# Altium PCB STM32F429.PcbDoc (part 2 of 2)
Units mm, origin at the board's own origin, x right, y up, seen from the top; angles counter-clockwise.
Board outline 66.8 x 95.4 mm, 2 copper layers (Top Layer, Bottom Layer); 134 components, 138 nets, 653 pads, 375 vias.
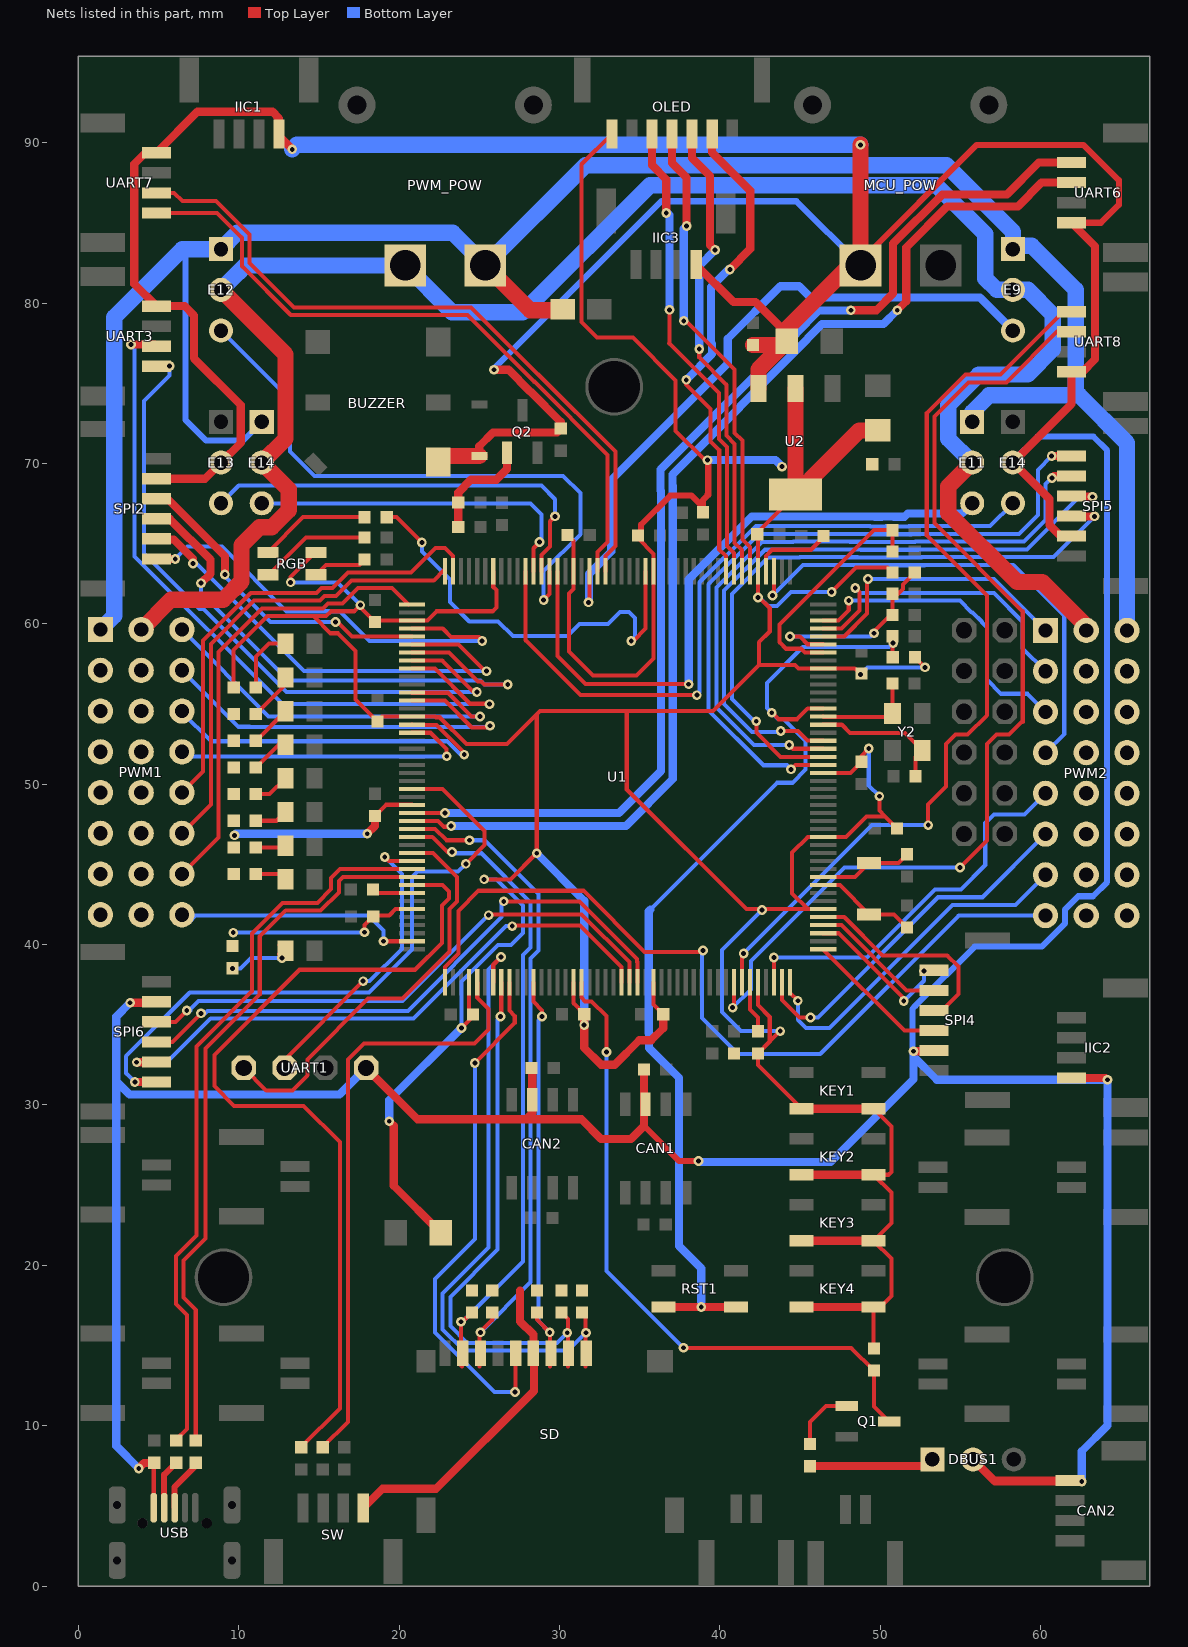
[diagram p2: the nets of this part, all layers, seen from the top]

## Via types
v1: diameter 0.61, hole 0.305, Top Layer to Bottom Layer, tented both sides, 375 vias

## Nets (pads, with @x,y where several pads share a name; then routed paths per layer and width w, separated by ;. In a path a pad name is that pad's centre, name@x,y a point inside that pad or via, vN(x,y) a via of type N, cw(c..) or ccw(c..) an arc to the next point about the centre after c; other vN are vias at no path point) (continued)
NetC8_1: C8.1 U1.125 | length 2.7
  Top Layer w0.254: C8.1@18.364,43.434 18.364,43.226 20.782,43.226 U1.125@20.799,43.208
NetC12_2: C12.2 U1.9 Y1.2 | length 6.3
  Top Layer w0.254: U1.9@46.43,43.708 47.478,43.708 Y1.2@49.301,41.885 50.84,41.885 C12.2@51.665,41.059
NetC13_2: C13.2 U1.10 Y1.1 | length 5.8
  Top Layer w0.254: U1.10@46.43,44.208 48.425,44.208 Y1.1@49.301,45.085 51.119,45.085 C13.2@51.665,45.631
NetC14_2: C14.2 U1.29 Y2.3 | length 8.6
  Top Layer w0.254: U1.29@46.43,53.708 47.593,53.708 48.114,53.188 51.534,53.188 Y2.3@52.616,52.105 52.197,51.686 C14.2@52.197,50.492
NetC15_2: C15.2 U1.30 Y2.1 | length 6.4
  Top Layer w0.254: U1.30@46.43,54.208 46.448,54.191 50.766,54.191 Y2.1@50.766,54.405 50.749,54.422 C15.2@50.749,56.286
NetDBUS1_1: DBUS1.1 R3.2 | length 7.8
  Top Layer w0.508: R3.2@45.617,7.48 52.819,7.48 DBUS1.1@53.238,7.899
NetLED1_1: D1.1 R9.2 | length 4.1
  Top Layer w0.254: R9.2@11.062,56.031 11.062,57.95 11.887,58.776 12.878,58.776 D1.1@12.903,58.75
NetLED2_1: D2.1 R10.2 | length 3
  Top Layer w0.254: R10.2@11.062,54.369 12.903,56.21 D2.1@12.903,56.653
NetLED3_1: D3.1 R11.2 | length 2.6
  Top Layer w0.254: R11.2@11.062,52.707 12.903,54.548 D3.1@12.903,54.556
NetLED4_1: D4.1 R13.2 | length 2.4
  Top Layer w0.254: R13.2@11.062,51.045 12.475,52.458 D4.1@12.903,52.458
NetLED5_1: D5.1 R14.2 | length 2.2
  Top Layer w0.254: R14.2@11.062,49.383 11.925,49.383 D5.1@12.903,50.361
NetLED6_1: D6.1 R15.2 | length 2.1
  Top Layer w0.254: R15.2@11.062,47.721 12.361,47.721 D6.1@12.903,48.264
NetLED7_1: D7.1 R17.2 | length 1.9
  Top Layer w0.254: R17.2@11.062,46.059 12.796,46.059 D7.1@12.903,46.166
NetLED8_1: D8.1 R18.2 | length 2
  Top Layer w0.254: R18.2@11.062,44.398 12.575,44.398 D8.1@12.903,44.069
NetPWR_1: PWR.1 R29.2 | length 4.5
  Top Layer w0.254: PWR.1@12.548,39.98 12.802,39.726 12.497,39.421 12.7,39.218 v1(12.7,39.167)
  Bottom Layer w0.254: v1(9.6,38.519) 10.108,38.519 10.755,39.167 v1(12.7,39.167)
NetQ1_1: Q1.1 R3.1 | length 4.1
  Top Layer w0.254: R3.1@45.618,8.865 45.618,10.236 46.609,11.227 Q1.1@47.904,11.227
NetQ2_1: Q2.1 R4.2 R5.2 | length 6.8
  Top Layer w0.508: R4.2@23.685,66.042 R5.2@23.685,67.566 23.685,68.186 24.486,68.986 26.06,68.986 26.721,69.647 Q2.1@26.721,70.663
NetR6_1: R6.1 U1.48 | length 5.1
  Top Layer w0.254: U1.48@42.865,63.274 42.865,64.229 43.254,64.618 45.669,64.618 46.355,65.303 R6.1@46.355,65.481
NetR12_1: R12.1 U1.171 | length 3.3
  Top Layer w0.254: U1.171@41.865,37.643 41.865,35.961 42.367,35.458 R12.1@42.367,34.595
NetR22_2: R22.2 RGB.R | length 6.9
  Top Layer w0.254: RGB.R@11.809,64.454 14.007,66.651 R22.2@17.844,66.651
NetR23_2: R23.2 RGB.B | length 3.4
  Top Layer w0.254: RGB.B@14.81,63.054 15.434,63.678 17.512,63.678 R23.2@17.843,64.01
NetR24_2: R24.2 RGB.G | length 7
  Top Layer w0.254: RGB.G@11.809,63.054 11.862,63.054 14.19,65.381 R24.2@17.843,65.381
NetR27_1: R27.1 USB.2 | length 3.1
  Top Layer w0.381: USB.2@5.344,4.891 5.344,6.945 R27.1@6.096,7.696
NetR28_1: R28.1 USB.3 | length 3.4
  Top Layer w0.381: USB.3@5.994,4.891 5.994,6.186 7.315,7.506 R28.1@7.315,7.696
OLED_CLK(PA5): OLED.3 U1.51 | length 29.4
  Top Layer w0.254: v1(38.71,77.14) 38.71,76.606 40.411,74.905 40.411,71.733 40.919,71.225 40.919,65.047 41.365,64.601 U1.51@41.365,63.274
  Top Layer w0.508: OLED.3@38.263,90.549 38.263,89.042 39.385,87.92 39.385,83.602 39.675,83.312 v1(39.7,83.312)
  Bottom Layer w0.508: v1(38.71,77.14) 38.71,82.321 v1(39.7,83.312)
OLED_DC(PA4): OLED.4 U1.50 | length 29.5
  Top Layer w0.254: v1(37.744,78.892) 37.891,78.892 40.919,75.864 40.919,71.907 41.402,71.425 41.402,65.247 41.865,64.784 U1.50@41.865,63.274
  Top Layer w0.508: OLED.4@37.013,90.549 37.013,88.742 37.922,87.833 v1(37.922,84.811)
  Bottom Layer w0.508: v1(37.744,78.892) 37.744,84.633 v1(37.922,84.811)
OLED_MOSI(PA7): OLED.2 U1.53 | length 31
  Top Layer w0.254: v1(37.897,75.213) 37.897,74.93 39.421,73.406 39.421,71.359 39.954,70.825 39.954,64.639 40.365,64.229 U1.53@40.365,63.274
  Top Layer w0.508: OLED.2@39.513,90.549 39.513,89.384 41.885,87.013 41.885,83.363 v1(40.615,82.093)
  Bottom Layer w0.508: v1(37.897,75.213) 39.497,76.814 39.497,77.466 39.446,77.517 39.446,81.001 40.538,82.093 v1(40.615,82.093)
OLED_RST(PA6): OLED.5 U1.52 | length 29.5
  Top Layer w0.254: v1(36.855,79.578) 36.855,77.521 36.83,77.495 39.929,74.397 39.929,71.533 40.437,71.025 40.437,64.847 40.865,64.419 U1.52@40.865,63.274
  Top Layer w0.508: OLED.5@35.763,90.549 35.763,88.595 36.652,87.706 v1(36.652,85.623)
  Bottom Layer w0.508: v1(36.652,85.623) 36.728,85.623 36.855,85.496 v1(36.855,79.578)
PE13: E13.3 U1.76 | length 26.5
  Top Layer w0.254: U1.76@28.865,63.274 28.865,64.278 29.413,64.827 29.413,66.396 v1(29.718,66.7)
  Bottom Layer w0.254: E13.3@8.89,67.513 9.996,68.619 28.866,68.619 29.718,67.767 v1(29.718,66.7)
PE14: E14.3@58.268,67.513 U1.78 | length 45.1
  Top Layer w0.254: U1.78@27.865,63.274 27.865,58.978 31.293,55.55 v1(38.557,55.55)
  Bottom Layer w0.254: v1(38.557,55.55) 38.735,55.728 38.735,62.592 42.234,66.091 49.371,66.091 49.397,66.065 50.337,66.065 50.363,66.091 50.577,66.091 50.602,66.065 51.76,66.065 51.785,66.091 56.845,66.091 E14.3@58.268,67.513
PGND: E9.1 E11.1 E12.1 E14.1@11.43,72.593 PWM1.1 PWM1.4 PWM1.7 PWM1.10 PWM1.13 PWM1.16 PWM1.19 PWM1.22 PWM2.3 PWM2.6 PWM2.9 PWM2.12 PWM2.15 PWM2.18 PWM2.21 PWM2.24 PWM_POW.2 R39.1 | length 142.3
  Top Layer w1.016: PWM_POW.2@25.371,82.347 28.165,79.553 R39.1@30.429,79.553
  Bottom Layer w0.381: 6.833,83.363 6.667,83.197 6.667,72.724 7.966,71.424 10.261,71.424 E14.1@11.43,72.593
  Bottom Layer w1.016: PWM1.1@1.372,59.639 2.235,60.503 2.235,79.121 6.477,83.363 6.833,83.363 E12.1@8.89,83.363 9.911,84.383 23.334,84.383 PWM_POW.2@25.371,82.347 31.619,88.595 54.127,88.595 58.268,84.455 E9.1@58.268,83.363 58.471,83.566 59.436,83.566 62.179,80.823 62.179,74.244 ; E11.1@55.728,72.593 55.728,73.191 56.781,74.244 62.408,74.244 65.38,71.272 PWM2.3@65.38,59.588
PWM_5V: E9.2 E11.2 E12.2 E14.2@11.43,70.053 PWM1.2 PWM1.5 PWM1.8 PWM1.11 PWM1.14 PWM1.17 PWM1.20 PWM1.23 PWM2.2 PWM2.5 PWM2.8 PWM2.11 PWM2.14 PWM2.17 PWM2.20 PWM2.23 PWM_POW.1 | length 122.2
  Top Layer w1.016: PWM1.2@3.912,59.639 5.766,61.493 9.027,61.493 10.17,62.637 10.17,64.907 11.29,66.027 12.046,66.027 13.106,67.087 13.106,68.377 E14.2@11.43,70.053 11.432,70.053 12.917,71.538 12.917,76.796 E12.2@8.89,80.823 ; E11.2@55.728,70.053 54.241,68.567 54.241,66.897 58.527,62.611 60.096,62.611 62.84,59.868 PWM2.2@62.84,59.588
  Bottom Layer w1.016: E12.2@8.89,80.823 9.943,81.876 9.945,81.876 10.377,82.308 10.377,82.309 10.414,82.347 PWM_POW.1@20.371,82.347 23.292,79.426 27.711,79.426 35.636,87.351 53.492,87.351 56.541,84.302 56.541,81.533 57.252,80.823 E9.2@58.268,80.823 59.207,80.823 60.757,79.273 60.757,77.114 59.182,75.54 56.132,75.54 54.241,73.648 54.241,71.538 55.726,70.053 E11.2@55.728,70.053
R(PF13): R22.1 U1.63 | length 26.9
  Top Layer w0.254: R22.1@19.228,66.65 19.837,66.65 v1(21.412,65.075) ; v1(34.468,58.928) 34.595,58.928 35.365,59.698 U1.63@35.365,63.274
  Bottom Layer w0.254: v1(21.412,65.075) 21.412,64.513 23.165,62.76 23.165,61.35 24.368,60.147 26.172,60.147 27.086,59.233 30.492,59.233 31.254,59.995 33.026,59.995 33.762,60.731 34.315,60.731 34.696,60.35 34.696,59.03 34.595,58.928 v1(34.468,58.928)
RESET: C2.2 R1.1 RST1.1 U1.31 | length 64.4
  Top Layer w0.254: v1(43.231,54.458) 43.637,54.051 44.815,54.051 45.472,54.708 U1.31@46.43,54.708 ; C2.2@50.762,59.232 50.762,57.925 R1.1@50.775,57.912
  Top Layer w0.508: RST1.1@36.493,17.41 v1(38.837,17.41) RST1.1@40.993,17.41
  Bottom Layer w0.254: 35.662,42.184 43.567,50.089 44.52,50.089 45.339,50.907 45.339,52.699 43.974,54.064 43.624,54.064 v1(43.231,54.458) 42.926,54.762 42.926,56.312 45.161,58.547 50.546,58.547 v1(50.8,58.801)
  Bottom Layer w0.508: 35.662,42.184 35.56,42.082 35.56,34.472 35.585,34.446 35.585,33.553 37.44,31.699 37.44,21.209 38.837,19.812 v1(38.837,17.41)
SDIO_CLK(PC12): SD.5 U1.141 | length 33
  Top Layer w0.254: v1(24.714,32.614) 27.203,35.103 27.203,35.554 26.865,35.893 U1.141@26.865,37.643 ; v1(27.212,12.099) 27.263,12.15 SD.5@27.263,14.524
  Bottom Layer w0.254: v1(24.714,32.614) 24.714,21.641 22.225,19.152 22.225,15.811 25.937,12.099 v1(27.212,12.099)
SDIO_CMD(PD2): R34.2 SD.3 U1.144 | length 26.1
  Top Layer w0.254: U1.144@28.365,37.643 28.365,36.44 28.905,35.9 v1(28.905,35.509) ; R34.2@28.599,17.056 28.599,16.613 v1(29.388,15.824) 29.412,15.8 29.412,13.686
  Bottom Layer w0.254: v1(28.905,35.509) 28.677,35.281 28.677,16.535 v1(29.388,15.824)
SDIO_D0(PC8): R35.2 SD.7 U1.117 | length 42.1
  Top Layer w0.254: U1.117@20.799,47.208 22.244,47.208 22.945,46.507 v1(24.384,46.507) ; 25.012,13.686 25.012,15.818 25.805,16.61 R35.2@25.805,17.056
  Bottom Layer w0.254: v1(24.384,46.507) 25.32,46.507 28.677,43.151 28.677,39.624 28.194,39.141 28.194,18.948 v1(25.07,15.824)
SDIO_D1(PC9): R36.2 SD.8 U1.118 | length 40.8
  Top Layer w0.254: U1.118@20.799,46.708 22.062,46.708 22.999,45.771 v1(23.292,45.771) ; 23.912,13.686 23.851,13.748 v1(23.851,16.485) 23.963,16.485 R36.2@24.535,17.056
  Bottom Layer w0.254: v1(23.292,45.771) 23.368,45.695 25.137,45.695 28.194,42.637 28.194,39.824 27.711,39.341 27.711,20.233 23.963,16.485 v1(23.851,16.485)
SDIO_D2(PC10): R32.2 SD.1 U1.139 | length 39.9
  Top Layer w0.254: U1.139@25.865,37.643 25.865,38.743 v1(26.34,39.218) ; R32.2@31.393,17.056 31.612,16.836 31.612,13.686
  Bottom Layer w0.254: v1(26.34,39.218) 25.578,38.456 25.578,21.104 22.708,18.234 22.708,16.011 24.038,14.681 30.531,14.681 v1(31.648,15.799)
SDIO_D3(PC11): R33.2 SD.2 U1.140 | length 34.4
  Top Layer w0.254: v1(26.314,35.509) 26.416,35.509 26.284,35.641 26.365,35.722 U1.140@26.365,37.643 ; R33.2@30.123,17.056 30.512,16.666 30.512,13.686
  Bottom Layer w0.254: v1(26.314,35.509) 26.137,35.331 26.137,20.98 23.19,18.034 23.19,16.211 24.237,15.164 29.845,15.164 v1(30.48,15.799)
SPI2_CLK(PB13): SPI2.3 U1.93 | length 20.2
  Top Layer w0.254: v1(16.027,60.122) 16.151,60.122 17.065,59.208 U1.93@20.799,59.208
  Top Layer w0.508: SPI2.3@4.864,67.798 5.547,67.798 9.129,64.216 v1(9.129,63.068)
  Bottom Layer w0.254: v1(9.129,63.068) 9.129,62.956 11.963,60.122 v1(16.027,60.122)
SPI2_MISO(PB14): SPI2.5 U1.94 | length 29.6
  Top Layer w0.254: U1.94@20.799,58.708 23.689,58.708 25.349,57.048 v1(25.451,57.048)
  Top Layer w0.508: SPI2.5@4.864,65.298 SPI2.5@4.935,65.227 ; SPI2.5@4.91,65.253 5.943,65.253 7.137,64.059 v1(7.137,63.754)
  Bottom Layer w0.254: v1(7.137,63.754) 7.36,63.754 14.066,57.048 v1(25.451,57.048)
SPI2_MOSI(PB15): SPI2.4 U1.95 | length 35
  Top Layer w0.254: U1.95@20.799,58.208 23.117,58.208 24.912,56.413 25.115,56.413 25.318,56.21 v1(26.772,56.21)
  Top Layer w0.508: SPI2.4@4.864,66.548 5.69,66.548 8.23,64.008 8.23,63.119 v1(7.645,62.535)
  Bottom Layer w0.254: v1(7.645,62.535) 7.645,61.925 13.106,56.464 25.064,56.464 25.318,56.21 v1(26.772,56.21)
SPI2_NSS(PB12): SPI2.6 U1.92 | length 27.8
  Top Layer w0.254: U1.92@20.799,59.708 22.715,59.708 23.232,59.191 24.985,59.191 25.171,59.004 v1(25.171,58.928)
  Top Layer w0.508: SPI2.6@4.864,64.048 v1(6.034,64.048)
  Bottom Layer w0.254: v1(6.034,64.048) 6.807,64.821 8.941,64.821 12.979,60.782 16.301,60.782 18.155,58.928 v1(25.171,58.928)
SPI4_CLK(PE2): SPI4.3 U1.1 | length 9
  Top Layer w0.254: U1.1@46.43,39.708 51.493,34.646 SPI4.3@53.34,34.646
SPI4_MISO(PE5): SPI4.5 U1.4 | length 8.6
  Top Layer w0.254: U1.4@46.43,41.208 47.568,41.208 51.63,37.146 SPI4.5@53.34,37.146
SPI4_MOSI(PE6): SPI4.4 U1.5 | length 13.4
  Top Layer w0.254: U1.5@46.43,41.708 47.75,41.708 50.139,39.319 54.169,39.319 54.864,38.624 54.864,36.917 53.843,35.896 SPI4.4@53.34,35.896
SPI4_NSS(PE4): SPI4.6 U1.3 | length 9.9
  Top Layer w0.254: U1.3@46.43,40.708 47.385,40.708 51.46,36.633 v1(51.46,36.474) ; v1(52.73,38.354) 53.298,38.354 SPI4.6@53.34,38.396
  Bottom Layer w0.254: v1(51.46,36.474) 52.73,37.744 v1(52.73,38.354)
SPI5_CLK(PF7): SPI5.3 U1.25 | length 40.2
  Top Layer w0.254: v1(42.266,53.924) 42.266,53.213 43.77,51.708 U1.25@46.43,51.708
  Top Layer w0.508: SPI5.3@61.925,66.72 61.945,66.7 v1(63.348,66.7)
  Bottom Layer w0.254: v1(42.266,53.924) 42.141,53.924 40.742,55.324 40.742,61.869 43.008,64.135 44.961,64.135 44.987,64.16 47.695,64.16 47.704,64.151 48.581,64.151 48.597,64.135 52.559,64.135 52.585,64.16 60.808,64.16 v1(63.348,66.7)
SPI5_MISO(PF8): SPI5.5 U1.26 | length 41.6
  Top Layer w0.254: v1(44.323,52.451) 44.566,52.208 U1.26@46.43,52.208
  Top Layer w0.508: v1(60.706,69.088) 60.838,69.22 SPI5.5@61.925,69.22
  Bottom Layer w0.254: v1(44.323,52.451) 42.122,52.451 39.776,54.797 39.776,62.268 42.608,65.1 44.562,65.1 44.587,65.126 48.094,65.126 48.104,65.116 48.981,65.116 48.997,65.1 52.159,65.1 52.185,65.126 58.953,65.126 60.3,66.472 60.3,68.708 60.68,69.088 v1(60.706,69.088)
SPI5_MOSI(PF9): SPI5.4 U1.27 | length 41
  Top Layer w0.254: v1(43.79,53.315) 44.869,53.315 45.458,52.726 46.413,52.726 U1.27@46.43,52.708
  Top Layer w0.508: SPI5.4@61.925,67.97 61.976,67.92 v1(63.221,67.92)
  Bottom Layer w0.254: v1(43.79,53.315) 43.739,53.264 41.992,53.264 40.259,54.997 40.259,62.068 42.808,64.618 44.761,64.618 44.787,64.643 47.894,64.643 47.904,64.634 48.781,64.634 48.797,64.618 52.359,64.618 52.385,64.643 59.153,64.643 60.782,66.272 60.782,66.319 62.382,67.92 v1(63.221,67.92)
SPI5_NSS(PF6): SPI5.6 U1.24 | length 44.3
  Top Layer w0.254: v1(44.425,50.927) 44.706,51.208 U1.24@46.43,51.208
  Top Layer w0.508: v1(60.681,70.46) 61.936,70.46 SPI5.6@61.925,70.47
  Bottom Layer w0.254: v1(44.425,50.927) 44.171,51.181 42.71,51.181 39.294,54.597 39.294,62.468 42.434,65.608 49.172,65.608 49.197,65.583 51.96,65.583 51.985,65.608 58.649,65.608 59.817,66.777 59.817,69.596 v1(60.681,70.46)
SPI6_CLK(PG13): SPI6.3 U1.156 | length 34.8
  Top Layer w0.254: SPI6.3@4.864,35.184 6.051,35.184 v1(6.756,35.89) ; v1(25.578,41.834) 25.629,41.885 31.376,41.885 34.347,38.913 34.347,37.643 U1.156@34.365,37.643
  Bottom Layer w0.254: v1(6.756,35.89) 6.985,35.89 6.985,35.986 7.473,36.474 20.218,36.474 v1(25.578,41.834)
SPI6_MISO(PG12): SPI6.5 U1.155 | length 37
  Top Layer w0.254: v1(27.051,41.148) 27.102,41.199 31.264,41.199 33.865,38.598 U1.155@33.865,37.643
  Top Layer w0.508: v1(3.632,32.664) 4.844,32.664 SPI6.5@4.864,32.684
  Bottom Layer w0.254: v1(3.632,32.664) 5.531,32.664 8.249,35.382 20.888,35.382 26.654,41.148 v1(27.051,41.148)
SPI6_MOSI(PG14): SPI6.4 U1.157 | length 37.1
  Top Layer w0.254: SPI6.4@4.864,33.934 5.867,33.934 v1(7.645,35.712) ; v1(26.518,42.697) 31.245,42.697 34.83,39.113 34.83,38.913 ; U1.157@34.865,37.643 34.865,38.913
  Bottom Layer w0.254: v1(7.645,35.712) 7.897,35.712 8.049,35.865 20.543,35.865 26.391,41.713 26.391,42.57 v1(26.518,42.697)
SPI6_NSS(PG8): SPI6.6 U1.112 | length 40.1
  Top Layer w0.254: U1.112@20.799,49.708 22.707,49.708 25.324,47.092 25.324,46.203 v1(24.155,45.034)
  Top Layer w0.508: v1(3.516,31.434) SPI6.6@4.864,31.434
  Bottom Layer w0.254: v1(3.516,31.434) 2.972,31.979 2.972,33.04 6.94,37.008 18.123,37.008 20.799,39.684 20.799,44.218 21.136,44.555 23.676,44.555 v1(24.155,45.034)
SWCLK(PA14): R20.2 U1.137 | length 37.6
  Top Layer w0.254: R20.2@15.232,8.66 16.815,10.242 16.815,32.837 17.811,33.833 24.689,33.833 25.565,34.709 25.565,35.988 24.865,36.688 U1.137@24.865,37.643
SWDIO(PA13): R19.2 U1.124 | length 54.2
  Top Layer w0.254: R19.2@13.888,8.66 16.307,11.079 16.307,27.686 14.046,29.947 9.703,29.947 8.471,31.178 8.471,33.109 13.792,38.43 20.976,38.43 22.657,40.111 22.657,42.424 23.114,42.881 23.114,43.307 22.713,43.708 U1.124@20.799,43.708
TIM1_CH1(PE9): E9.3 U1.70 | length 42.3
  Top Layer w0.254: v1(31.801,61.341) 31.865,61.405 U1.70@31.865,63.274
  Bottom Layer w0.508: v1(31.801,61.341) 31.826,61.366 31.826,63.119 33.223,64.516 33.223,68.961 40.488,76.225 40.488,77.775 43.764,81.051 44.933,81.051 45.644,80.34 56.21,80.34 E9.3@58.268,78.283
TIM1_CH2(PE11): E11.3 U1.74 | length 40.4
  Top Layer w0.254: U1.74@29.865,63.274 29.865,57.994 31.623,56.236 v1(38.049,56.236)
  Bottom Layer w0.508: v1(38.049,56.236) 38.049,62.768 41.981,66.7 49.624,66.7 49.649,66.675 50.085,66.675 50.11,66.7 50.829,66.7 50.855,66.675 51.507,66.675 51.71,66.878 55.093,66.878 E11.3@55.728,67.513
TIM1_CH3(PE12): E12.3 U1.75 | length 38
  Top Layer w0.254: v1(29.007,61.493) 29.365,61.851 U1.75@29.365,63.274
  Bottom Layer w0.254: E12.3@8.89,78.283 13.183,73.99 13.183,70.739 14.707,69.215 30.226,69.215 31.293,68.148 31.293,65.583 29.007,63.297 v1(29.007,61.493)
TIM1_CH4(PE14): E14.3@11.43,67.513 U1.77 | length 21.8
  Top Layer w0.254: U1.77@28.365,63.274 28.365,64.712 v1(28.753,65.1)
  Bottom Layer w0.254: E14.3@11.43,67.513 28.189,67.513 28.88,66.822 28.88,64.973 v1(28.753,65.1)
TIM2_CH1(PA0): PWM2.1 U1.40 | length 17.9
  Top Layer w0.254: U1.40@46.43,59.208 47.75,59.208 49.174,60.633 49.174,62.738 v1(49.225,62.789)
  Bottom Layer w0.254: v1(49.225,62.789) 57.099,62.789 PWM2.1@60.3,59.588
TIM2_CH2(PA1): PWM2.4 U1.41 | length 19.2
  Top Layer w0.254: U1.41@46.43,59.708 47.568,59.708 48.692,60.832 48.692,61.976 v1(48.438,62.23)
  Bottom Layer w0.254: v1(48.438,62.23) 48.743,61.925 57.081,61.925 58.877,60.129 58.877,58.471 PWM2.4@60.3,57.048
TIM2_CH3(PA2): PWM2.7 U1.42 | length 19.5
  Top Layer w0.254: U1.42@46.43,60.208 47.385,60.208 48.031,60.855 v1(48.031,61.443)
  Bottom Layer w0.254: v1(48.031,61.443) 54.973,61.443 55.697,60.719 55.748,60.719 56.337,60.129 56.337,60.079 56.642,59.774 56.642,56.533 57.536,55.639 59.169,55.639 PWM2.7@60.3,54.508
TIM2_CH4(PA3): PWM2.10 U1.47 | length 30.9
  Top Layer w0.254: v1(43.282,61.773) 43.365,61.856 U1.47@43.365,63.274
  Bottom Layer w0.254: v1(43.282,61.773) 45.187,63.678 47.495,63.678 47.504,63.669 48.381,63.669 48.397,63.652 52.759,63.652 52.785,63.678 58.288,63.678 61.468,60.498 61.468,53.137 PWM2.10@60.3,51.968
TIM4_CH1(PD12): PWM1.3 U1.100 | length 25.7
  Top Layer w0.254: U1.100@20.799,55.708 20.805,55.702 23.047,55.702 24.52,54.229 v1(25.044,54.229)
  Bottom Layer w0.254: PWM1.3@6.452,59.639 11.862,54.229 v1(25.044,54.229)
TIM4_CH2(PD13): PWM1.6 U1.101 | length 26.3
  Top Layer w0.254: U1.101@20.799,55.208 22.858,55.208 24.523,53.543 25.629,53.543 25.654,53.569 v1(25.654,53.645)
  Bottom Layer w0.254: PWM1.6@6.452,57.099 9.969,53.581 10.681,53.581 10.693,53.569 25.578,53.569 v1(25.654,53.645)
TIM4_CH3(PD14): PWM1.9 U1.104 | length 22.9
  Top Layer w0.254: U1.104@20.799,53.708 20.817,53.691 22.328,53.691 24.054,51.965 v1(24.054,51.841)
  Bottom Layer w0.254: PWM1.9@6.452,54.559 6.452,54.483 8.255,52.68 22.987,52.68 23.825,51.841 v1(24.054,51.841)
TIM4_CH4(PD15): PWM1.12 U1.105 | length 19.7
  Top Layer w0.254: U1.105@20.799,53.208 21.95,53.208 22.962,52.197 v1(22.962,51.74)
  Bottom Layer w0.254: PWM1.12@6.452,52.019 6.731,51.74 v1@23.038,51.74
TIM5_CH1(PH10): PWM1.15 U1.87 | length 29.2
  Top Layer w0.254: PWM1.15@6.452,49.479 7.772,50.8 7.772,58.953 10.744,61.925 14.849,61.925 15.154,62.23 15.85,62.23 16.815,63.195 20.726,63.195 22.26,64.729 22.865,64.729 23.365,64.229 U1.87@23.365,63.274
TIM5_CH2(PH11): PWM1.18 U1.88 | length 29.1
  Top Layer w0.254: PWM1.18@6.452,46.939 8.255,48.743 8.255,58.754 10.944,61.443 15.049,61.443 15.354,61.747 16.053,61.747 17.018,62.713 22.156,62.713 22.791,63.348 U1.88@22.865,63.274
TIM5_CH3(PH12): PWM1.21 U1.89 | length 28.7
  Top Layer w0.254: PWM1.21@6.452,44.399 8.738,46.685 8.738,58.242 11.455,60.96 15.249,60.96 15.554,61.265 16.459,61.265 17.424,62.23 19.552,62.23 U1.89@20.574,61.208
TIM5_CH4(PIO): PWM1.24 U1.131 | length 15.8
  Top Layer w0.254: v1(19.025,40.208) U1.131@20.799,40.208
  Bottom Layer w0.254: PWM1.24@6.452,41.859 6.909,41.402 7.309,41.803 18.091,41.803 19.025,40.869 v1(19.025,40.208)
TIM8_CH1(PI5): PWM2.13 U1.174 | length 24.3
  Top Layer w0.254: v1(43.358,39.192) 43.358,37.65 U1.174@43.365,37.643
  Bottom Layer w0.254: v1(43.358,39.192) 49.157,39.192 53.398,43.434 55.016,43.434 56.54,44.958 56.54,47.574 57.074,48.108 58.979,48.108 PWM2.13@60.3,49.428
TIM8_CH2(PI6): PWM2.16 U1.175 | length 22.7
  Top Layer w0.254: U1.175@43.865,37.643 43.865,36.557 44.964,35.458 v1(45.644,35.458)
  Bottom Layer w0.254: v1(45.644,35.458) 46.105,35.458 53.598,42.951 56.363,42.951 PWM2.16@60.3,46.888
TIM8_CH3(PI7): PWM2.19 U1.176 | length 22.1
  Top Layer w0.254: U1.176@44.365,37.643 44.365,36.991 v1(44.856,36.5)
  Bottom Layer w0.254: v1(44.856,36.5) 44.856,35.312 45.37,34.798 46.838,34.798 54.508,42.469 58.42,42.469 PWM2.19@60.3,44.348
TIM8_CH4(PI2): PWM2.22 U1.133 | length 52.2
  Top Layer w0.254: U1.133@22.865,37.643 22.865,38.598 23.698,39.431 23.698,42.1 24.956,43.358 31.496,43.358 35.306,39.548 38.862,39.548 v1(38.938,39.624)
  Bottom Layer w0.254: v1@38.875,39.56 38.875,35.42 41.123,33.172 46.253,33.172 54.889,41.808 PWM2.22@60.3,41.808
USART1_RX(PA10): U1.121 UART1.3 | length 18.7
  Top Layer w0.254: UART1.3@12.852,32.309 12.852,32.817 v1(17.755,37.719) ; v1(19.101,45.466) 19.359,45.208 U1.121@20.799,45.208
  Bottom Layer w0.254: v1(17.755,37.719) 18.152,37.719 20.168,39.735 20.168,44.399 v1(19.101,45.466)
USART1_TX(PA9): U1.120 UART1.4 | length 25.8
  Top Layer w0.254: UART1.4@10.312,32.309 11.709,30.912 13.335,30.912 14.275,31.852 14.275,32.837 18.065,36.627 20.211,36.627 23.139,39.555 23.139,42.224 23.597,42.681 23.597,44.225 22.113,45.708 U1.120@20.799,45.708
USART2_RX: Q1.3 R2.1 U1.150 | length 41.7
  Top Layer w0.254: U1.150@31.365,37.643 31.365,36.688 31.591,36.462 31.997,36.462 32.918,35.541 v1(32.918,33.299) ; v1(37.719,14.859) 48.184,14.859 R2.1@49.606,13.437 49.606,11.201 Q1.3@50.546,10.262
  Bottom Layer w0.254: v1(32.918,33.299) 32.918,19.66 v1(37.719,14.859)
USART3_RX(PD9）: U1.97 UART3.3 | length 46.6
  Top Layer w0.254: U1.97@20.799,57.208 22.223,57.208 24.415,55.016 25.603,55.016 v1(25.629,54.991)
  Top Layer w0.508: v1(3.277,77.419) 4.752,77.419 UART3.3@4.864,77.307
  Bottom Layer w0.254: v1(3.277,77.419) 3.505,77.191 3.505,64.202 12.716,54.991 v1(25.629,54.991)
USART3_TX(PD8): U1.96 UART3.4 | length 42.4
  Top Layer w0.254: U1.96@20.799,57.708 22.682,57.709 24.638,55.753 v1(24.841,55.753)
  Top Layer w0.508: UART3.4@4.864,76.057 4.881,76.073 v1(5.69,76.073)
  Bottom Layer w0.254: v1(5.69,76.073) 5.69,75.482 4.089,73.882 4.089,64.386 7.552,60.923 7.809,60.923 12.979,55.753 v1(24.841,55.753)
USART6_RX(PC7): U1.116 UART6.3 | length 71.1
  Top Layer w0.254: U1.116@20.799,47.708 22.427,47.708 22.79,47.346 23.241,47.346 v1(23.241,47.396)
  Top Layer w0.508: v1(51.054,79.553) 51.613,80.112 51.613,83.474 54.169,86.03 58.572,86.03 60.051,87.508 UART6.3@61.925,87.508
  Bottom Layer w0.508: v1(23.241,47.396) 34.138,47.396 37.059,50.317 37.059,68.584 37.033,68.609 37.033,69.316 45.466,77.749 45.466,77.8 46.355,78.689 50.19,78.689 v1(51.054,79.553)
USART6_TX(PC6): U1.115 UART6.4 | length 70.8
  Top Layer w0.254: U1.115@20.799,48.208 v1(22.861,48.208)
  Top Layer w0.508: v1(48.158,79.553) 49.759,79.553 50.8,80.594 50.8,83.703 53.863,86.766 57.887,86.766 59.879,88.758 UART6.4@61.925,88.758
  Bottom Layer w0.508: v1(22.861,48.208) 33.701,48.208 36.322,50.829 36.322,68.279 36.297,68.304 36.297,69.621 44.729,78.054 44.729,78.105 46.152,79.527 v1@48.133,79.527
USART7_RX(PE7): U1.68 UART7.3 | length 44.1
  Top Layer w0.254: UART7.3@4.864,86.869 5.968,86.869 6.477,86.36 8.578,86.36 10.668,84.27 10.668,82.496 13.438,79.726 24.471,79.726 28.619,75.578 28.638,75.578 33.477,70.739 33.477,64.841 32.865,64.229 U1.68@32.865,63.274
USART7_TX(PE8): U1.69 UART7.4 | length 42.9
  Top Layer w0.254: UART7.4@4.864,85.619 8.636,85.619 10.185,84.07 10.185,82.296 13.238,79.243 24.271,79.243 28.419,75.095 28.438,75.095 32.995,70.539 32.995,65.1 32.365,64.47 U1.69@32.365,63.274
USART8_RX(PE0): U1.169 UART8.3 | length 63.7
  Top Layer w0.254: v1(40.792,36.068) 40.869,36.144 40.869,37.639 U1.169@40.865,37.643 ; v1(54.966,44.806) 56.642,46.482 56.642,52.509 57.231,53.099 58.026,53.099 58.801,53.873 58.877,53.873 58.877,60.782 53.377,66.282 53.377,72.935 55.499,75.057 57.863,75.057 61.018,78.212 UART8.3@61.925,78.212
  Bottom Layer w0.254: v1(40.792,36.068) 41.932,37.208 41.932,38.967 47.772,44.806 v1(54.966,44.806)
USART8_TX(PE1): U1.170 UART8.4 | length 57.5
  Top Layer w0.254: U1.170@41.365,37.643 41.365,39.333 v1(41.478,39.446) ; v1(52.984,47.447) 52.984,48.746 54.102,49.864 54.102,52.509 54.691,53.099 55.443,53.099 56.642,54.298 56.642,61.773 52.895,65.52 52.895,73.135 55.299,75.54 57.5,75.54 61.422,79.462 UART8.4@61.925,79.462
  Bottom Layer w0.254: v1(41.478,39.446) 49.479,47.447 v1(52.984,47.447)
USB_D+(PA12): R28.2 U1.123 | length 45.1
  Top Layer w0.254: R28.2@7.317,9.08 7.317,17.22 6.553,17.983 6.553,20.295 7.925,21.666 7.925,33.513 11.303,36.891 11.303,40.491 12.925,42.113 15.097,42.113 16.243,43.26 16.243,43.964 16.488,44.208 U1.123@20.799,44.208
USB_D-(PA11): R27.2 U1.122 | length 46.2
  Top Layer w0.254: R27.2@6.098,9.08 6.098,9.126 6.756,9.785 6.756,16.916 6.071,17.602 6.071,20.574 7.366,21.869 7.366,33.637 10.82,37.091 10.82,40.691 12.725,42.596 14.897,42.596 15.761,43.46 15.761,44.164 16.305,44.708 U1.122@20.799,44.708
VCC_3.3M: 3.2 C3.2 C4.2 C5.2 C17.2 C18.2 C19.2 C20.2 C21.2 C22.2 C23.2 C24.2 C25.2 C26.2 C27.2 C28.2 CAP2.A CAP3.A KEY1.1 KEY2.1 KEY3.1 KEY4.1 OLED.7 R1.2 R2.2 R8.2 R9.1 R10.1 R11.1 R12.2 R13.1 R14.1 R15.1 R17.1 R18.1 R25.2 R26.1 R29.1 R32.1 R33.1 R34.1 R35.1 R36.1 RGB.A SD.4 SW.4 U1.6 U1.15 U1.23 U1.36 U1.38 U1.49 U1.62 U1.72 U1.82 U1.91 U1.103 U1.114 U1.127 U1.136 U1.149 U1.159 U1.172 U2.2 | length 404.2
  Top Layer w0.254: R9.1@9.677,56.032 9.677,58.369 11.786,60.477 15.449,60.477 15.754,60.782 17.196,60.782 v1(17.577,61.163) ; v1(13.233,62.586) 13.233,62.931 14.757,64.454 RGB.A@14.81,64.454 ; 14.681,60.452 15.723,59.411 16.174,59.411 17.272,58.313 17.272,55.281 C28.2@18.642,53.911 18.939,54.208 U1.103@20.799,54.208 20.817,54.226 22.247,54.226 22.3,54.173 22.528,54.173 24.2,52.502 26.721,52.502 28.778,54.559 34.188,54.559 ; v1@17.577,61.022 C25.2@18.49,60.109 18.589,60.208 U1.91@20.799,60.208 21.754,60.208 22.328,60.782 25.832,60.782 26.06,61.011 26.06,62.097 25.865,62.293 U1.82@25.865,63.274 ; v1(17.831,40.767) 17.831,41.21 18.429,41.808 19.38,41.808 19.78,42.208 U1.127@20.799,42.208 ; C24.2@18.49,48.019 19.188,48.717 20.79,48.717 U1.114@20.799,48.708 ; v1(23.876,34.798) 24.6,35.522 C27.2@24.6,35.635 24.365,35.87 U1.136@24.365,37.643 ; v1(25.298,44.069) 26.949,44.069 v1(28.575,45.695) 28.575,54.356 ; C18.2@30.493,65.534 30.865,65.162 U1.72@30.865,63.274 30.865,62.177 30.582,61.894 30.582,58.277 32.089,56.769 34.798,56.769 35.865,57.836 U1.62@35.865,63.274 35.865,64.364 34.885,65.343 C21.2@34.885,65.507 ; U1.149@30.865,37.643 30.865,36.344 31.534,35.674 C19.2@31.534,35.66 ; OLED.7@33.263,90.549 31.369,88.655 31.369,78.821 32.339,77.851 34.566,77.851 37.236,75.181 37.236,72.034 39.065,70.206 v1(39.218,70.206) ; U1.159@35.865,37.643 35.865,36.257 C22.2@36.462,35.66 ; U1.172@42.365,37.643 42.365,36.223 43.104,35.484 43.104,33.949 R12.2@42.366,33.211 ; v1(43.757,34.602) R12.2@42.366,33.211 ; KEY1.1@45.081,29.769 42.366,32.484 R12.2@42.366,33.211 ; U2.2@45.695,69.063 U2.2@44.704,68.072 42.171,65.539 42.365,65.346 U1.49@42.365,63.274 42.367,63.271 v1(42.367,61.646) 42.438,61.646 43.104,60.98 43.104,59.512 42.443,58.852 42.443,57.429 ; U1.6@46.43,42.208 45.475,42.208 ; U1.23@46.43,50.708 48.132,50.708 C23.2@48.82,51.397 48.82,51.767 v1(49.276,52.222) ; U1.38@46.43,58.208 45.293,58.208 45.056,58.445 44.12,58.445 43.713,58.852 43.713,59.946 49.606,65.838 C5.2@50.762,65.838 C4.2@50.762,64.517 ; v1(46.965,61.976) 48.489,63.5 50.458,63.5 R8.2@50.762,63.196 ; v1(48.768,56.845) 48.405,57.208 U1.36@46.43,57.208 44.896,57.208 44.828,57.277 44.825,57.277 44.673,57.429 42.443,57.429 ; R2.2@49.581,14.834 KEY4.1@49.581,17.41 49.998,17.41 50.686,18.098 50.686,20.424 KEY3.1@49.581,21.529 50.686,22.635 50.686,24.543 KEY2.1@49.581,25.649 50.516,25.649 50.686,25.82 50.686,28.663 KEY1.1@49.581,29.769 ; v1(49.936,49.251) 49.936,48.347 50.303,47.981 ; C17.2@51.041,47.242 50.303,47.981 ; R1.2@52.159,57.91 v1(52.781,57.288) ; 34.188,54.559 39.573,54.559 42.443,57.429 ; 34.188,54.559 34.188,49.663 41.643,42.208 45.475,42.208 ; 45.475,42.208 44.501,43.183 44.501,45.734 45.475,46.708 U1.15@46.43,46.708 47.856,46.708 49.129,47.981 50.303,47.981
  Top Layer w0.381: C21.2@34.885,65.507 35.077,65.507 35.077,66.177 36.896,67.996 38.231,67.996 R26.1@38.937,67.29 ; R26.1@38.937,66.954 R26.1@38.937,67.29 ; 39.218,68.09 39.268,68.039 ; v1@39.268,70.155 39.268,68.039 ; R26.1@38.937,67.29 38.937,67.707 39.268,68.039
  Top Layer w0.508: SW.4@17.76,5.042 SW.4@17.76,4.877 18.954,6.071 22.297,6.071 28.397,12.171 28.397,14.49 SD.4@28.363,14.524 28.363,15.68 27.534,16.51 27.534,18.44 ; v1(18.009,46.914) 18.49,47.395 C24.2@18.49,48.019 ; v1(19.38,28.981) 19.66,28.702 19.66,24.96 CAP3.A@22.584,22.036 ; C19.2@31.534,35.66 v1(31.534,34.989) 31.534,33.57 32.592,32.512 33.444,32.512 34.968,34.036 35.712,34.036 36.462,34.785 C22.2@36.462,35.66 ; KEY4.1@45.081,17.41 KEY4.1@49.581,17.41 ; KEY3.1@45.081,21.529 KEY3.1@49.581,21.529 ; KEY2.1@45.081,25.649 KEY2.1@49.581,25.649 ; KEY1.1@45.081,29.769 KEY1.1@49.581,29.769
  Top Layer w1.016: U2.2@44.704,68.072 U2.2@44.704,74.671 ; U2.2@45.695,69.063 48.689,72.057 CAP2.A@49.835,72.057
  Bottom Layer w0.254: v1(9.652,40.742) 17.805,40.742 v1(17.831,40.767) ; v1(13.233,62.586) 16.154,62.586 v1(17.577,61.163) ; v1(23.876,34.798) 23.876,37.688 26.168,39.98 26.975,39.98 27.711,40.716 27.711,42.438 26.08,44.069 v1(25.298,44.069) ; v1(42.367,61.646) 42.475,61.646 43.008,61.112 43.555,61.112 44.419,61.976 v1(46.965,61.976) ; v1(42.621,42.164) 40.132,39.675 40.132,35.794 41.324,34.602 v1(43.757,34.602) ; v1(48.768,56.845) 49.211,57.288 v1(52.781,57.288) ; v1(49.276,52.222) 49.276,49.911 v1(49.936,49.251)
  Bottom Layer w0.508: v1(9.728,46.812) 9.83,46.914 v1(18.009,46.914) ; v1(19.38,28.981) 19.38,30.302 v1(23.876,34.798) ; v1(28.575,45.695) 31.534,42.735 v1(31.534,34.989) ; v1(39.218,70.206) 43.459,70.206 v1(43.866,69.799)
VCC_5V: 2.2 BUZZER.1 C1.2 C6.2 C11.2 C16.1 CAN1.3 CAN2.3@28.296,30.328 CAN2.4@61.824,6.584 CAP1.A DBUS1.2 E13.2 E14.2@58.268,70.053 IIC1.1 IIC2.1 IIC3.1 MCU_POW.1 SPI2.2 SPI4.2 SPI5.2 SPI6.2 U2.3 UART1.1 UART3.1 UART6.1 UART7.1 UART8.1 USB.1 Z1.2 | length 403.2
  Top Layer w0.254: USB.1@4.694,4.891 C16.1@4.694,7.666
  Top Layer w0.381: 35.268,28.689 37.452,26.505 v1(38.659,26.505) ; MCU_POW.1@48.768,82.347 48.768,82.623 56.01,89.865 62.661,89.865 64.872,87.655 64.872,86.131 63.749,85.008 UART6.1@61.925,85.008
  Top Layer w0.508: v1(3.226,36.373) 4.803,36.373 SPI6.2@4.864,36.434 ; v1(3.759,7.341) 4.085,7.666 C16.1@4.694,7.666 ; SPI2.2@4.864,69.048 7.885,69.048 E13.2@8.89,70.053 10.123,71.286 10.123,73.647 7.214,76.556 7.214,79.223 6.629,79.807 UART3.1@4.864,79.807 3.482,81.189 3.482,88.669 4.182,89.369 UART7.1@4.864,89.369 7.427,91.932 12.09,91.932 12.508,91.514 IIC1.1@12.508,90.549 12.508,90.413 v1(13.335,89.586) ; UART1.1@17.932,32.309 21.133,29.108 27.889,29.108 ; Z1.2@24.994,70.46 24.994,71.069 25.857,71.933 29.834,71.933 C1.2@30.075,72.174 30.075,72.596 28.186,74.486 28.167,74.486 26.808,75.844 v1(25.908,75.844) ; C11.2@28.258,32.31 28.296,32.272 CAN2.3@28.296,30.328 28.296,29.515 27.889,29.108 ; C6.2@35.268,32.209 35.268,28.689 34.455,27.877 32.589,27.877 31.358,29.108 27.889,29.108 ; IIC3.1@38.517,82.398 38.517,82.391 40.847,80.061 42.211,80.061 44.168,78.105 CAP1.A@44.168,77.622 CAP1.A@43.926,77.381 ; v1(52.07,33.35) 53.295,33.35 SPI4.2@53.34,33.396 ; DBUS1.2@55.677,7.899 DBUS1.2@55.728,7.849 ; DBUS1.2@55.778,7.899 57.094,6.584 ; CAN2.4@61.824,6.584 57.094,6.584 ; IIC2.1@61.925,31.687 64.045,31.687 v1(64.16,31.572) ; SPI5.2@61.925,65.47 61.243,65.47 60.543,66.171 60.543,67.778 E14.2@58.268,70.053 61.925,73.711 UART8.1@61.925,75.712 62.608,75.712 63.393,76.497 63.393,83.541 UART6.1@61.925,85.008 ; v1(62.56,6.528) 57.15,6.528 57.094,6.584
  Top Layer w1.016: BUZZER.1@22.428,70.078 22.81,70.46 Z1.2@24.994,70.46 ; 2.2@42.061,77.381 43.926,77.381 42.404,75.859 U2.3@42.404,74.671 ; CAP1.A@44.168,78.105 44.168,78.407 48.108,82.347 MCU_POW.1@48.768,82.347 ; MCU_POW.1@48.768,82.623 v1(48.768,89.865)
  Bottom Layer w0.381: v1(25.908,75.844) 25.908,75.903 36.352,86.347 44.767,86.347 MCU_POW.1@48.768,82.347 ; v1@52.184,33.35 51.994,33.541 51.994,35.984 52.184,36.175 52.184,36.182 55.88,39.878 60.075,39.878 61.506,41.309 61.506,42.181 62.34,43.015 63.259,43.015 64.135,43.891 64.135,70.815 63.271,71.679 59.817,71.679 58.268,70.129 E14.2@58.268,70.053
  Bottom Layer w0.508: v1(3.226,36.373) 2.362,35.509 2.362,31.475 ; v1(3.759,7.341) 2.362,8.738 2.362,31.475 ; UART1.1@17.932,32.309 16.271,30.647 3.19,30.647 2.362,31.475 ; v1(38.659,26.505) 38.722,26.441 46.91,26.441 52.07,31.602 52.07,33.02 ; v1(52.07,33.35) 52.07,33.02 ; v1(62.56,6.528) 62.56,8.407 64.16,10.008 v1(64.16,31.572) 53.518,31.572 52.07,33.02
  Bottom Layer w1.016: v1(13.335,89.586) 13.614,89.865 v1(48.768,89.865)
VDDA: C9.2 C10.2 R8.1 U1.39 | length 12.7
  Top Layer w0.254: v1(44.374,59.207) 44.976,59.207 45.458,58.726 46.413,58.726 U1.39@46.43,58.708 ; v1(49.606,59.411) 49.606,59.512 50.647,60.553 C10.2@50.762,60.553 C9.2@50.762,61.874 51.105,61.874 51.41,62.179 51.41,62.458 R8.1@52.146,63.194
  Bottom Layer w0.254: v1(44.374,59.207) 49.403,59.207 v1(49.606,59.411)
pads on no net: BUZZER.0 CAN1.0 CAN1.5 CAN2.0 CAN2.5 IIC1.0 IIC2.0 IIC3.0 MCU_POW.0 OLED.0 PWM_POW.0 SD.0 SD.9 SD.11 SD.12 SPI2.0 SPI4.0 SPI5.0 SPI6.0 SW.0 U1.2 U1.7 U1.8 U1.11 U1.12 U1.13 U1.21 U1.28 U1.43 U1.44 U1.56 U1.57 U1.59 U1.60 U1.73 U1.79 U1.80 U1.86 U1.98 U1.99 U1.119 U1.128 U1.129 U1.130 U1.132 U1.134 U1.138 U1.145 U1.146 U1.147 U1.151 U1.152 U1.153 U1.154 U1.160 U1.161 U1.162 U1.165 U1.173 UART3.0 UART6.0 UART7.0 UART8.0 USB.0 USB.4

## Polygon pours and split planes (outlines as drawn)
GND on Top Layer "NONET_L-01_P-001" (solid, remove dead copper, pour order 7): -0.076,0.025 66.777,0.025 66.827,0.076 66.827,95.402 0.127,95.402 0.051,95.326
GND on Bottom Layer "NONET_L-01_P-001" (solid, remove dead copper, pour order 9): -0.076,0.025 66.751,0.025 66.751,95.504 66.7,95.453 -0.025,95.453

## Other copper
Top Layer:
  region net GND: 49.682,55.677 48.108,55.677 48.108,54.991 49.682,54.991
  region net PWM_5V: 63.881,60.858 61.798,60.858 61.798,40.488 63.881,40.488
  region net PWM_5V: 5.004,60.884 2.794,60.884 2.794,40.615 5.004,40.615
  region net VCC_5V: 44.755,77.876 41.554,77.876 41.554,76.251 44.755,76.251
  region net VCC_5V: 42.875,77.673 41.554,77.673 41.554,73.711 42.875,73.711
  region net VCC_3.3M: 50.648,73 44.552,73 44.552,71.323 50.648,71.323
  region net VCC_3.3M: 47.701,73 42.977,73 42.977,66.954 47.701,66.954
  region net GND: 50.698,78.334 46.228,78.334 46.228,74.117 50.698,74.117
  region net BOOT1: 39.368,66.027 37.235,66.027 37.235,65.062 39.368,65.062
  region net VCC_3.3M: 10.109,56.49 9.195,56.49 9.195,39.472 10.109,39.472
  region net VCC_3.3M: 42.824,33.68 40.386,33.68 40.386,32.715 42.824,32.715
  region net PGND: 66.548,60.808 64.262,60.808 64.262,40.437 66.548,40.437
  region net PGND: 2.286,60.96 0.051,60.96 0.051,40.538 2.286,40.538
  region net VCC_3.3M: 31.75,18.847 22.25,18.847 22.25,18.085 31.75,18.085
  region net VCC_3.3M: 23.114,22.809 22.149,22.809 22.149,18.034 23.114,18.034
  region net VCC_3.3M: 49.835,71.679 47.193,71.679 47.193,69.545 49.835,69.545
  region net RESET: 51.206,59.563 50.368,59.563 50.368,57.506 51.206,57.506
  region net VCC_3.3M: 51.105,66.243 50.241,66.243 50.241,62.916 51.105,62.916

## Silkscreen, mask and mechanical layers (free items; w line width, h text height)
Top Overlay:
  text "+" at 13.284,90.145 h1.27
  text "+" at 32.029,89.789 h1.27
  text "+" at 4.699,89.764 h1.27
  text "G" at 8.56,84.76 h1.27
  text "G" at 57.861,84.734 h1.27
  text "+" at 39.065,81.585 h1.27
  text "+" at 4.674,80.213 h1.27
  text "+" at 61.443,74.295 h1.27
  text "G" at 8.458,73.965 h1.27
  text "G" at 57.887,73.965 h1.27
  text "G" at 11.024,73.939 h1.27
  text "G" at 55.296,73.939 h1.27
  text "G" at 4.928,71.298 h1.27
  text "+" at 6.223,68.707 h1.27
  text "NC" at 39.443,67.539 h1.27 r90
  text "+" at 59.817,65.126 h1.27
  text "G" at 61.112,62.636 h1.27
  text "G" at 57.252,44.679 h1.27
  text "G" at 65.075,39.599 h1.27
  text "+" at 62.636,39.573 h1.27
  text "G" at 4.801,38.405 h1.27
  text "NC" at 41.3,30.912 h1.27 r90
  text "G" at 52.68,30.658 h1.27
  text "+" at 61.366,30.48 h1.27
  text "+" at 17.704,30.15 h1.27
  text "T" at 9.982,30.124 h1.27
  text "R" at 12.573,30.124 h1.27
  text "G" at 15.037,30.124 h1.27
  text "H" at 4.851,26.924 h1.27
  text "H" at 13.487,26.899 h1.27
  text "H" at 61.062,23.597 h1.27
  text "H" at 52.426,23.419 h1.27
  text "H" at 4.877,14.554 h1.27
  text "H" at 13.513,14.529 h1.27
  text "H" at 52.73,11.379 h1.27
  text "H" at 61.138,11.379 h1.27
  text "+" at 61.087,7.036 h1.27
  text "+" at 18.491,4.953 h1.27
  text "H" at 39.776,4.775 h1.27
  text "H" at 46.584,4.724 h1.27
  text "L" at 60.985,1.626 h1.27
Mechanical 1:
  the board outline again, w0.152
Drill Drawing:
  the board outline again, w0.254

## Text inside footprints (layer, text, board x,y; h text height)
MCU_POW: Top Overlay "+" at 47.266,82.956 h2 r180
PWM_POW: Top Overlay "+" at 18.868,82.956 h2 r180